# Altium PCB BLE_PCB_Rev2.PcbDoc (part 2 of 2)
Units mm, origin at the board's own origin, x right, y up, seen from the top; angles counter-clockwise.
Board outline 81.41 x 40.9 mm, 2 copper layers (Top Layer, Bottom Layer), stack 1.57 mm thick; 28 components, 29 nets, 238 pads, 40 vias.
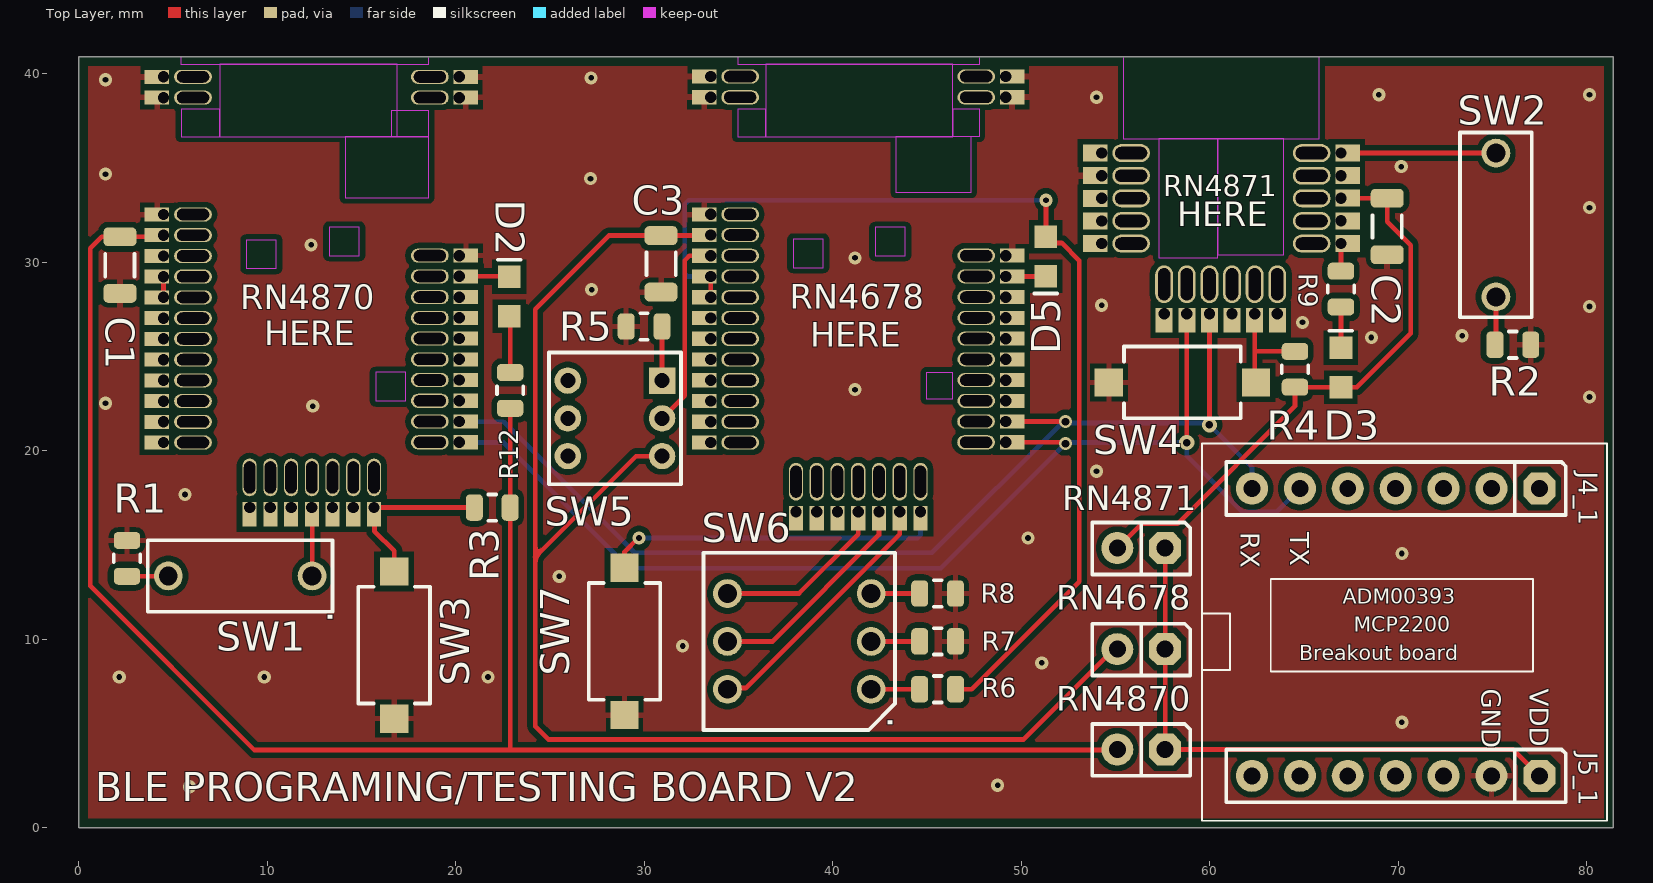
[diagram p0: Top Layer view]

## Silkscreen, mask and mechanical layers (free items; w line width, h text height) (continued)
TITLE MIRROR (M17): (continued)
  text "PART NUMBER:" at 11.82,-154.796 h1
  text "TITLE:" at 63.82,-154.796 h1.14
  text "'.ProjectpartNumber'" at -0.18,-155.046 h1.5
  text "D" at -18.925,-155.305 h1.78
  text "D" at 356.995,-155.305 h1.78
  text "'.ProjectTitle'" at 63.82,-159.296 h2.5
  text "GERBER FILE:" at 35.82,-163.796 h1.14
  text "PCB DESIGNER:" at 63.82,-163.796 h1.14
  text "'.Plot_File_Name'" at 35.82,-166.796 h1.5
  text "'.ProjectDrawnBy'" at 63.82,-166.796 h1.78
  text "M" at 95.82,-168.796 h15.24
  text "DATE:" at -2.9,-169.796 h1.14
  text "BOARD NUMBER:" at 35.8,-169.796 h1.14
  text "ENGINEER:" at 63.8,-169.796 h1.14
  text "Microchip Technology Inc." at 97.05,-172.056 h1.78
  text "'.PRINT_DATE'" at -2.9,-172.796 h1.5
  text "04-'.ProjectPCBNumber'" at 35.8,-172.796 h1.6
  text "'.ProjectEngineer'" at 63.8,-172.796 h1.78
  text "2355 W. Chandler Blvd." at 95.82,-174.796 h1.78
  text "LAYER NAME:" at 35.8,-175.296 h1.14
  text "10mm" at -2.2,-175.396 h0.7
  text "REV:" at 5.05,-175.546 h1.14
  text "PCB FILE NAME:" at 63.8,-175.546 h1.14
  text "400mil" at -2.1,-177.096 h0.7
  text "Chandler, AZ  85224" at 94.82,-177.296 h1.78
  text "'.PCB_FILE_NAME_NO_PATH'" at 63.8,-177.546 h1.14
  text "6" at 10.234,-181.518 h1.78
  text "5" at 73.861,-181.518 h1.78
  text "4" at 137.336,-181.518 h1.78
  text "3" at 201.005,-181.518 h1.78
  text "2" at 264.234,-181.518 h1.78
  text "1" at 327.624,-181.518 h1.78

## Dimensions
81.407,0 to 81.407,40.904 on FAB (M4)
0,0 to 81.407,40.904 on FAB (M4)

## Text inside footprints (layer, text, board x,y; h text height)
C1: Top Courtyard "C" at 1.892,30.045 h0.6 r270
C2: Top Courtyard "C" at 69.107,32.093 h0.6 r270
C3: Top Courtyard "C" at 31.194,29.712 h0.6 r90
SW1: Top Assembly "1" at 12.871,13.256 h1 r180
SW2: Top Assembly "1" at 75.277,36.273 h1 r270
SW5: Top Assembly "1" at 30.607,24.765 h1 r270
SW6: Top Assembly "1" at 40.513,7.092 h1 r90